# EAGLE board cpc_backplane_v1.10 (EAGLE 6.4)
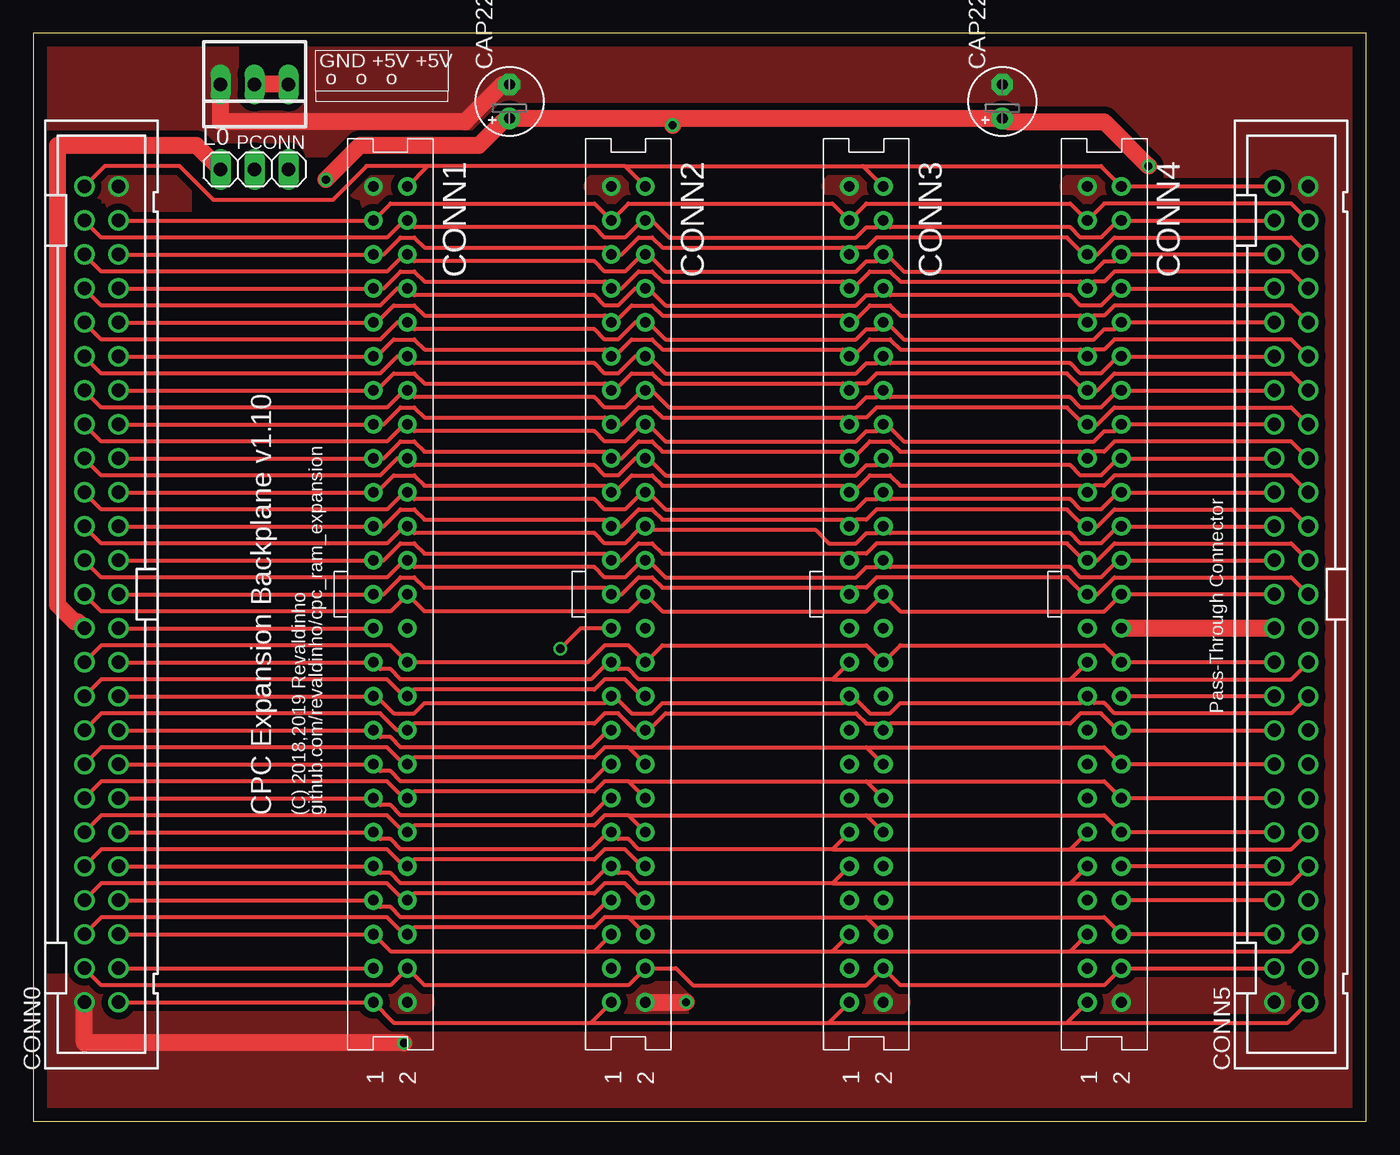
[diagram p0: board, top side]
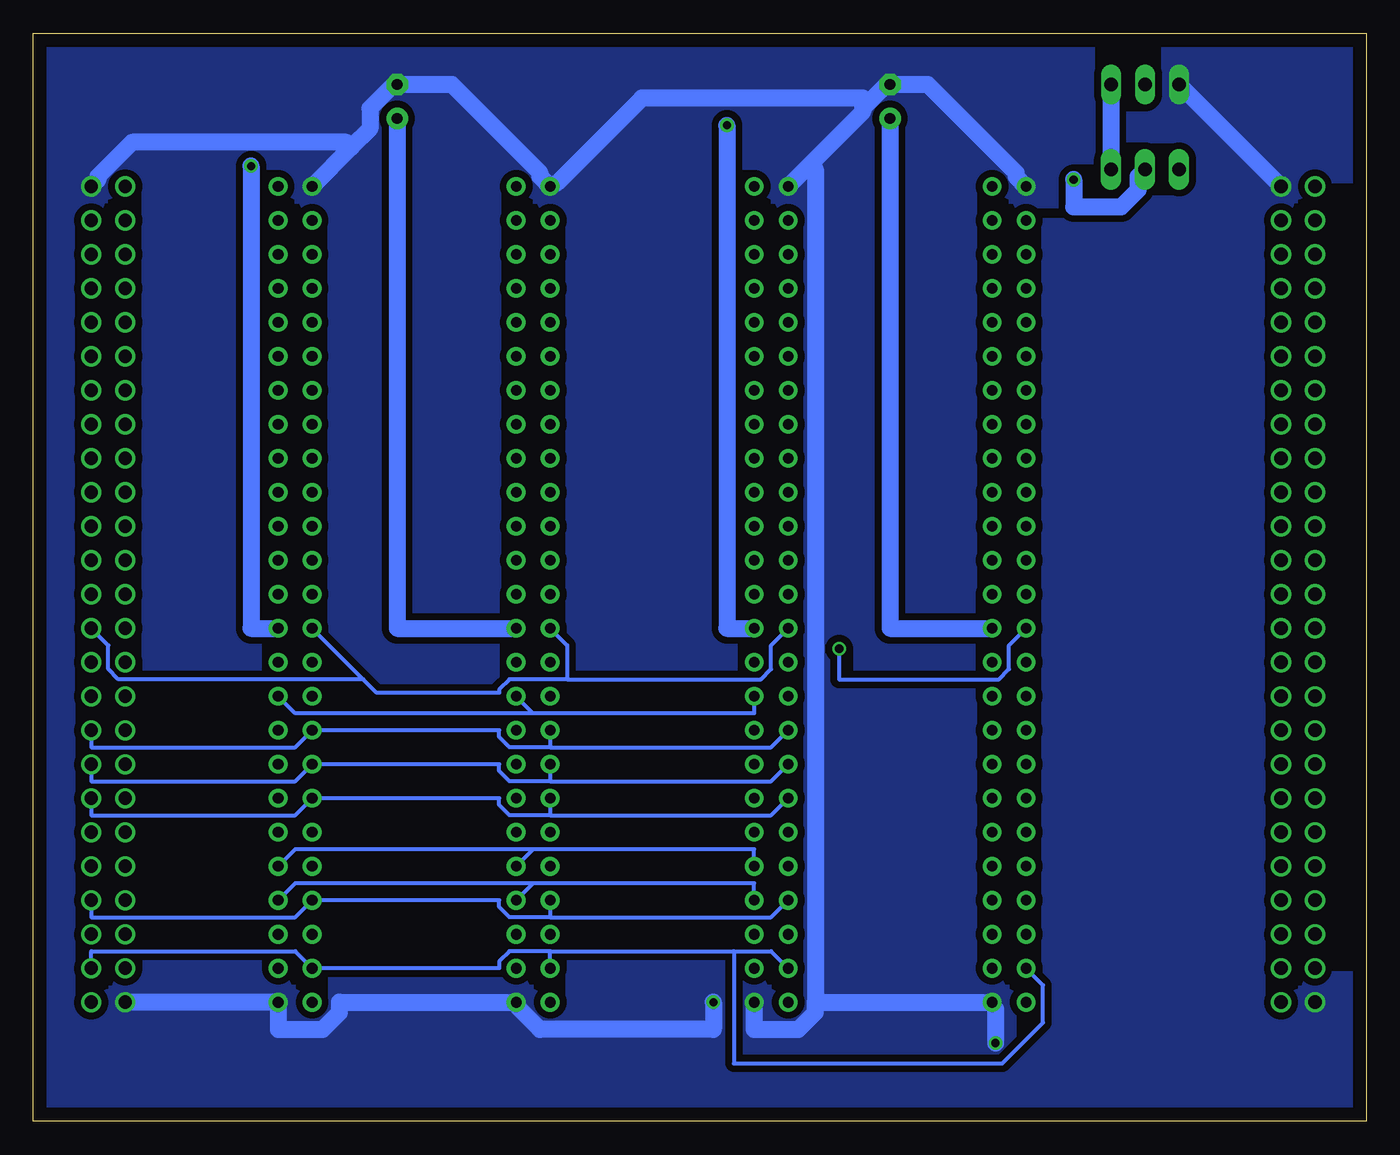
[diagram p1: board, bottom side, seen from below]

Size 99.57 x 81.28 mm. Coordinates in mm from the lower left corner, seen from the top.
Outline: 0,0 99.57,0 99.57,81.28 0,81.28 0,0
Copper layers (1*16): Top 0.035mm / dielectric 1.5mm / Bottom 0.035mm
Design rules "default": minimum track width 10mil, minimum drill 24mil, track to track 8mil, track to pad 8mil, pad to pad 8mil, via to via 8mil, smd to smd 8mil, copper to edge 40mil, drill to drill 8mil, minimum pad ring 10mil, minimum via ring 8mil, stop-mask expansion 4mil, vias tented up to drill 0mil, thermal gap 10mil
Net classes: 0 signal: width 0.305 mm, clearance 0.254 mm; 1 supply: width 1.27 mm, clearance 0.508 mm

## Footprints (pad centres in the part's own frame; a part is rotated, then mirrored left to right if it is on the bottom)
E2,5-5 = drill 0.813 pad 1.6: + -1.27,0 | drill 0.813 pad 1.6 octagon: - 1.27,0
PAK100/2500-50 = drill 1 pad 1.422: 1 -30.48,-1.27; 2 -30.48,1.27; 3 -27.94,-1.27; 4 -27.94,1.27; 5 -25.4,-1.27; 6 -25.4,1.27; 7 -22.86,-1.27; 8 -22.86,1.27; 9 -20.32,-1.27; 10 -20.32,1.27; 11 -17.78,-1.27; 12 -17.78,1.27; 13 -15.24,-1.27; 14 -15.24,1.27; 15 -12.7,-1.27; 16 -12.7,1.27; 17 -10.16,-1.27; 18 -10.16,1.27; 19 -7.62,-1.27; 20 -7.62,1.27; 21 -5.08,-1.27; 22 -5.08,1.27; 23 -2.54,-1.27; 24 -2.54,1.27; 25 0,-1.27; 26 0,1.27; 27 2.54,-1.27; 28 2.54,1.27; 29 5.08,-1.27; 30 5.08,1.27; 31 7.62,-1.27; 32 7.62,1.27; 33 10.16,-1.27; 34 10.16,1.27; 35 12.7,-1.27; 36 12.7,1.27; 37 15.24,-1.27; 38 15.24,1.27; 39 17.78,-1.27; 40 17.78,1.27; 41 20.32,-1.27; 42 20.32,1.27; 43 22.86,-1.27; 44 22.86,1.27; 45 25.4,-1.27; 46 25.4,1.27; 47 27.94,-1.27; 48 27.94,1.27; 49 30.48,-1.27; 50 30.48,1.27
S50V = drill 0.8 pad 1.4: 1 30.48,-1.27; 2 30.48,1.27; 3 27.94,-1.27; 4 27.94,1.27; 5 25.4,-1.27; 6 25.4,1.27; 7 22.86,-1.27; 8 22.86,1.27; 9 20.32,-1.27; 10 20.32,1.27; 11 17.78,-1.27; 12 17.78,1.27; 13 15.24,-1.27; 14 15.24,1.27; 15 12.7,-1.27; 16 12.7,1.27; 17 10.16,-1.27; 18 10.16,1.27; 19 7.62,-1.27; 20 7.62,1.27; 21 5.08,-1.27; 22 5.08,1.27; 23 2.54,-1.27; 24 2.54,1.27; 25 0,-1.27; 26 0,1.27; 27 -2.54,-1.27; 28 -2.54,1.27; 29 -5.08,-1.27; 30 -5.08,1.27; 31 -7.62,-1.27; 32 -7.62,1.27; 33 -10.16,-1.27; 34 -10.16,1.27; 35 -12.7,-1.27; 36 -12.7,1.27; 37 -15.24,-1.27; 38 -15.24,1.27; 39 -17.78,-1.27; 40 -17.78,1.27; 41 -20.32,-1.27; 42 -20.32,1.27; 43 -22.86,-1.27; 44 -22.86,1.27; 45 -25.4,-1.27; 46 -25.4,1.27; 47 -27.94,-1.27; 48 -27.94,1.27; 49 -30.48,-1.27; 50 -30.48,1.27
1X03 = drill 1.016 long: 1 -2.54,0; 2 0,0; 3 2.54,0
22-23-2031 = drill 1 long: 1 -2.54,0; 2 0,0; 3 2.54,0

## Placement (x,y rotation side)
CAP22UF_0  [E2,5-5]  35.56,76.2 90 top
CAP22UF_1  [E2,5-5]  72.39,76.2 90 top
CONN0  [PAK100/2500-50]  5.08,39.37 90 top
CONN1  [S50V]  26.67,39.37 270 top
CONN2  [S50V]  44.45,39.37 270 top
CONN3  [S50V]  62.23,39.37 270 top
CONN4  [S50V]  80.01,39.37 270 top
CONN5  [PAK100/2500-50]  93.98,39.37 90 top
L0  [1X03]  16.51,71.12 0 top
PCONN  [22-23-2031]  16.51,77.47 180 top

## Library data of the parts
CAP22UF_0 CAP22UF_1 = resistor
CONN0 CONN5 = con-3m
CONN1-CONN4 = con-3m-skt-header
L0 = pinhead
PCONN = con-molex

## Nets
A0: CONN0.33 CONN1.33 CONN2.33 CONN3.33 CONN4.33 CONN5.33
A1: CONN0.34 CONN1.34 CONN2.34 CONN3.34 CONN4.34 CONN5.34
A2: CONN0.35 CONN1.35 CONN2.35 CONN3.35 CONN4.35 CONN5.35
A3: CONN0.36 CONN1.36 CONN2.36 CONN3.36 CONN4.36 CONN5.36
A4: CONN0.37 CONN1.37 CONN2.37 CONN3.37 CONN4.37 CONN5.37
A5: CONN0.38 CONN1.38 CONN2.38 CONN3.38 CONN4.38 CONN5.38
A6: CONN0.39 CONN1.39 CONN2.39 CONN3.39 CONN4.39 CONN5.39
A7: CONN0.40 CONN1.40 CONN2.40 CONN3.40 CONN4.40 CONN5.40
A8: CONN0.41 CONN1.41 CONN2.41 CONN3.41 CONN4.41 CONN5.41
A9: CONN0.42 CONN1.42 CONN2.42 CONN3.42 CONN4.42 CONN5.42
A10: CONN0.43 CONN1.43 CONN2.43 CONN3.43 CONN4.43 CONN5.43
A11: CONN0.44 CONN1.44 CONN2.44 CONN3.44 CONN4.44 CONN5.44
A12: CONN0.45 CONN1.45 CONN2.45 CONN3.45 CONN4.45 CONN5.45
A13: CONN0.46 CONN1.46 CONN2.46 CONN3.46 CONN4.46 CONN5.46
A14: CONN0.47 CONN1.47 CONN2.47 CONN3.47 CONN4.47 CONN5.47
A15: CONN0.48 CONN1.48 CONN2.48 CONN3.48 CONN4.48 CONN5.48
BUSACK_B: CONN0.13 CONN1.13 CONN2.13 CONN3.13 CONN4.13 CONN5.13
BUSRESET_B: CONN0.11 CONN1.11 CONN2.11 CONN3.11 CONN4.11 CONN5.11
BUSRQ_B: CONN0.14 CONN1.14 CONN2.14 CONN3.14 CONN4.14 CONN5.14
CLK: CONN0.1 CONN1.1 CONN2.1 CONN3.1 CONN4.1 CONN5.1
CURSOR: CONN0.5 CONN1.5 CONN2.5 CONN3.5 CONN4.5 CONN5.5
D0: CONN0.25 CONN1.25 CONN2.25 CONN3.25 CONN4.25 CONN5.25
D1: CONN0.26 CONN1.26 CONN2.26 CONN3.26 CONN4.26 CONN5.26
D2: CONN0.27 CONN1.27 CONN2.27 CONN3.27 CONN4.27 CONN5.27
D3: CONN0.28 CONN1.28 CONN2.28 CONN3.28 CONN4.28 CONN5.28
D4: CONN0.29 CONN1.29 CONN2.29 CONN3.29 CONN4.29 CONN5.29
D5: CONN0.30 CONN1.30 CONN2.30 CONN3.30 CONN4.30 CONN5.30
D6: CONN0.31 CONN1.31 CONN2.31 CONN3.31 CONN4.31 CONN5.31
D7: CONN0.32 CONN1.32 CONN2.32 CONN3.32 CONN4.32 CONN5.32
EXP_B: CONN0.3 CONN1.3 CONN2.3 CONN3.3 CONN4.3 CONN5.3
HALT_B: CONN0.17 CONN1.17 CONN2.17 CONN3.17 CONN4.17 CONN5.17
INT_B: CONN0.16 CONN1.16 CONN2.16 CONN3.16 CONN4.16 CONN5.16
IOREQ_B: CONN0.20 CONN1.20 CONN2.20 CONN3.20 CONN4.20 CONN5.20
LPEN: CONN0.4 CONN1.4 CONN2.4 CONN3.4 CONN4.4 CONN5.4
M1_B: CONN0.22 CONN1.22 CONN2.22 CONN3.22 CONN4.22 CONN5.22
MREQ_B: CONN0.23 CONN1.23 CONN2.23 CONN3.23 CONN4.23 CONN5.23
NMI_B: CONN0.15 CONN1.15 CONN2.15 CONN3.15 CONN4.15 CONN5.15
RAMDIS: CONN0.6 CONN1.6 CONN2.6 CONN3.6 CONN4.6 CONN5.6
RAMRD_B: CONN0.7 CONN1.7 CONN2.7 CONN3.7 CONN4.7 CONN5.7
RD_B: CONN0.19 CONN1.19 CONN2.19 CONN3.19 CONN4.19 CONN5.19
READY: CONN0.12 CONN1.12 CONN2.12 CONN3.12 CONN4.12 CONN5.12
RESET_B: CONN0.10 CONN1.10 CONN2.10 CONN3.10 CONN4.10 CONN5.10
RFSH_B: CONN0.21 CONN1.21 CONN2.21 CONN3.21 CONN4.21 CONN5.21
ROMDIS: CONN0.8 CONN1.8 CONN2.8 CONN3.8 CONN4.8 CONN5.8
ROMEN_B: CONN0.9 CONN1.9 CONN2.9 CONN3.9 CONN4.9 CONN5.9
SOUND: CONN0.50 CONN1.50 CONN2.50 CONN3.50 CONN4.50 CONN5.50
VDD1 [supply]: CAP22UF_0.+ CAP22UF_1.+ CONN1.24 CONN2.24 CONN3.24 CONN4.24 CONN5.24 L0.2
VDD_CPC [supply]: CONN0.24 L0.1
VDD_EXT [supply]: L0.3 PCONN.1 PCONN.2
VSS [supply]: CAP22UF_0.- CAP22UF_1.- CONN0.2 CONN0.49 CONN1.2 CONN1.49 CONN2.2 CONN2.49 CONN3.2 CONN3.49 CONN4.2 CONN4.49 CONN5.2 CONN5.49 PCONN.3
WR_B: CONN0.18 CONN1.18 CONN2.18 CONN3.18 CONN4.18 CONN5.18

## Tracks (layer width: path | path; a pad name or v marks a point on that pad's centre or on a via)
A0
  Top 0.305: CONN5.33 93.98,50.8 80.77,50.8 80.01,50.04 79.25,50.04 CONN4.33 78.23,50.04 64.77,50.04 64.01,50.8 62.48,50.8 61.21,49.53 CONN3.33 60.45,50.04 46.99,50.04 46.23,50.8 45.21,50.8 43.94,49.53 CONN2.33 42.67,50.04 29.21,50.04 28.45,50.8 27.43,50.8 26.16,49.53 CONN1.33 CONN0.33
A1
  Top 0.305: CONN5.34 CONN4.34 81.03,49.53 79.76,48.26 78.23,48.26 77.47,49.02 64.01,49.02 CONN3.34 62.99,49.02 62.23,49.02 61.47,48.26 47.24,48.26 45.97,49.53 CONN2.34 44.96,49.53 43.69,48.26 42.67,48.26 41.91,49.02 28.45,49.02 CONN1.34 27.18,49.53 25.91,48.26 5.08,48.26 CONN0.34
A2
  Top 0.305: CONN5.35 93.98,53.34 80.77,53.34 79.5,52.07 CONN4.35 78.49,52.07 77.22,53.34 62.99,53.34 62.23,52.58 61.47,52.58 CONN3.35 60.45,52.58 46.99,52.58 46.23,53.34 45.21,53.34 43.94,52.07 CONN2.35 42.67,52.58 29.21,52.58 28.45,53.34 27.43,53.34 26.16,52.07 CONN1.35 CONN0.35
A3
  Top 0.305: CONN5.36 CONN4.36 80.77,51.56 80.01,51.56 79.25,50.8 65.02,50.8 63.75,52.07 CONN3.36 62.99,51.56 62.23,51.56 61.47,50.8 47.24,50.8 45.97,52.07 CONN2.36 45.47,52.07 44.2,50.8 42.67,50.8 41.91,51.56 28.45,51.56 CONN1.36 27.69,52.07 26.42,50.8 5.08,50.8 CONN0.36
A4
  Top 0.305: CONN5.37 93.98,55.88 80.77,55.88 79.5,54.61 CONN4.37 78.49,54.61 77.22,55.88 62.99,55.88 62.23,55.12 61.47,55.12 CONN3.37 60.45,55.12 46.99,55.12 46.23,55.88 44.7,55.88 43.43,54.61 CONN2.37 42.67,55.12 29.21,55.12 28.45,55.88 26.92,55.88 25.65,54.61 CONN1.37 CONN0.37
A5
  Top 0.305: CONN5.38 CONN4.38 81.03,54.61 79.76,53.34 78.23,53.34 77.47,54.1 64.01,54.1 CONN3.38 62.99,54.1 62.23,54.1 61.47,53.34 47.5,53.34 46.23,54.61 CONN2.38 45.47,54.61 44.2,53.34 42.67,53.34 41.91,54.1 28.45,54.1 CONN1.38 27.69,54.61 26.42,53.34 5.08,53.34 CONN0.38
A6
  Top 0.305: CONN5.39 93.98,58.42 80.77,58.42 80.01,57.66 79.25,57.66 CONN4.39 78.23,57.66 64.77,57.66 64.01,58.42 62.48,58.42 61.21,57.15 CONN3.39 60.45,57.66 46.99,57.66 46.23,58.42 44.7,58.42 43.43,57.15 CONN2.39 42.67,57.66 29.21,57.66 28.45,58.42 26.92,58.42 25.65,57.15 CONN1.39 CONN0.39
A7
  Top 0.305: CONN5.40 CONN4.40 81.03,57.15 79.76,55.88 78.23,55.88 77.47,56.64 64.01,56.64 CONN3.40 62.99,56.64 62.23,56.64 61.47,55.88 47.24,55.88 45.97,57.15 CONN2.40 44.96,57.15 43.69,55.88 42.67,55.88 41.91,56.64 28.45,56.64 CONN1.40 27.18,57.15 25.91,55.88 5.08,55.88 CONN0.40
A8
  Top 0.305: CONN5.41 93.98,60.96 80.77,60.96 80.01,60.2 79.25,60.2 CONN4.41 78.23,60.2 64.77,60.2 64.01,60.96 62.48,60.96 61.21,59.69 CONN3.41 60.45,60.2 46.99,60.2 46.23,60.96 44.7,60.96 43.43,59.69 CONN2.41 42.67,60.2 29.21,60.2 28.45,60.96 26.92,60.96 25.65,59.69 CONN1.41 CONN0.41
A9
  Top 0.305: CONN5.42 CONN4.42 80.77,59.18 80.01,59.18 79.25,58.42 65.02,58.42 63.75,59.69 CONN3.42 62.99,59.18 62.23,59.18 61.47,58.42 47.24,58.42 45.97,59.69 CONN2.42 44.96,59.69 43.69,58.42 42.67,58.42 41.91,59.18 28.45,59.18 CONN1.42 27.18,59.69 25.91,58.42 5.08,58.42 CONN0.42
A10
  Top 0.305: CONN5.43 93.98,63.5 80.77,63.5 80.01,62.74 79.25,62.74 CONN4.43 78.23,62.74 64.77,62.74 64.01,63.5 62.48,63.5 61.21,62.23 CONN3.43 60.45,62.74 46.99,62.74 46.23,63.5 45.21,63.5 43.94,62.23 CONN2.43 42.67,62.74 29.21,62.74 28.45,63.5 27.43,63.5 26.16,62.23 CONN1.43 CONN0.43
A11
  Top 0.305: CONN5.44 CONN4.44 81.03,62.23 79.76,60.96 78.23,60.96 77.47,61.72 64.01,61.72 CONN3.44 62.99,61.72 62.23,61.72 61.47,60.96 47.24,60.96 45.97,62.23 CONN2.44 44.96,62.23 43.69,60.96 42.67,60.96 41.91,61.72 28.45,61.72 CONN1.44 27.18,62.23 25.91,60.96 5.08,60.96 CONN0.44
A12
  Top 0.305: CONN5.45 93.98,66.04 80.77,66.04 79.5,64.77 CONN4.45 78.49,64.77 77.22,66.04 62.99,66.04 62.23,65.28 61.47,65.28 CONN3.45 60.45,65.28 46.99,65.28 46.23,66.04 45.21,66.04 43.94,64.77 CONN2.45 42.67,65.28 29.21,65.28 28.45,66.04 27.43,66.04 26.16,64.77 CONN1.45 CONN0.45
A13
  Top 0.305: CONN5.46 CONN4.46 80.77,64.26 80.01,64.26 79.25,63.5 65.02,63.5 63.75,64.77 CONN3.46 62.99,64.26 62.23,64.26 61.47,63.5 47.24,63.5 45.97,64.77 CONN2.46 45.47,64.77 44.2,63.5 42.67,63.5 41.91,64.26 28.45,64.26 CONN1.46 27.69,64.77 26.42,63.5 5.08,63.5 CONN0.46
A14
  Top 0.305: CONN5.47 93.98,68.58 80.01,68.58 CONN4.47 77.47,68.58 62.23,68.58 CONN3.47 59.69,68.58 44.45,68.58 CONN2.47 41.91,68.58 26.67,68.58 CONN1.47 CONN0.47
A15
  Top 0.305: CONN5.48 CONN4.48 81.03,67.31 79.76,66.04 78.23,66.04 77.47,66.8 64.01,66.8 CONN3.48 62.99,66.8 62.23,66.8 61.47,66.04 47.5,66.04 46.23,67.31 CONN2.48 45.47,67.31 44.2,66.04 42.67,66.04 41.91,66.8 28.45,66.8 CONN1.48 27.69,67.31 26.42,66.04 5.08,66.04 CONN0.48
BUSACK_B
  Top 0.305: CONN0.13 CONN1.13 25.91,23.62 26.67,23.62 27.43,22.86 41.66,22.86 42.93,24.13 CONN2.13
  Bottom 0.305: CONN5.13 95.25,22.86 80.01,22.86 CONN4.13 64.77,24.13 64.77,23.62 64.01,22.86 60.96,22.86 | CONN2.13 44.45,22.86 60.96,22.86 | CONN3.13 60.96,22.86
BUSRESET_B
  Top 0.305: CONN0.11 CONN1.11 25.91,21.08 26.67,21.08 27.43,20.32 41.66,20.32 42.93,21.59 CONN2.11 43.69,21.08 44.45,21.08 45.21,20.32 59.69,20.32 | CONN3.11 59.69,20.32 | 77.47,20.32 CONN4.11 | 59.69,20.32 77.47,20.32 | CONN5.11 93.98,20.32 77.47,20.32
BUSRQ_B
  Top 0.305: CONN5.14 CONN4.14 80.01,25.4 62.23,25.4 | 44.45,25.4 42.67,25.4 41.91,24.64 28.45,24.64 CONN1.14 27.69,24.13 26.42,25.4 5.08,25.4 CONN0.14 | CONN2.14 44.45,25.4 | 62.23,25.4 CONN3.14 | 44.45,25.4 62.23,25.4
CLK
  Top 0.305: CONN0.1 CONN1.1 26.92,7.37 41.66,7.37 | 41.66,7.37 CONN2.1 | 59.44,7.37 CONN3.1 | 41.66,7.37 59.44,7.37 | 77.22,7.37 CONN4.1 | 59.44,7.37 77.22,7.37 | CONN5.1 93.73,7.37 77.22,7.37
CURSOR
  Top 0.305: CONN0.5 CONN1.5 26.67,12.7 41.91,12.7 | 41.91,12.7 CONN2.5 | 59.69,12.7 CONN3.5 | 41.91,12.7 59.69,12.7 | 77.47,12.7 CONN4.5 | 59.69,12.7 77.47,12.7 | CONN5.5 93.98,12.7 77.47,12.7
D0
  Top 0.305: CONN5.25 93.98,40.64 80.77,40.64 79.5,39.37 CONN4.25 78.49,39.37 77.22,40.64 62.99,40.64 62.23,39.88 61.47,39.88 CONN3.25 60.45,39.88 46.99,39.88 46.23,40.64 45.21,40.64 43.94,39.37 CONN2.25 42.67,39.88 29.21,39.88 28.45,40.64 27.43,40.64 26.16,39.37 CONN1.25 CONN0.25
D1
  Top 0.305: CONN5.26 CONN4.26 80.01,38.1 64.77,38.1 CONN3.26 62.23,38.1 46.99,38.1 CONN2.26 44.45,38.1 29.21,38.1 CONN1.26 26.67,38.1 5.08,38.1 CONN0.26
D2
  Top 0.305: CONN5.27 93.98,43.18 80.77,43.18 79.5,41.91 CONN4.27 78.49,41.91 77.22,43.18 62.99,43.18 62.23,42.42 61.47,42.42 CONN3.27 60.45,42.42 46.99,42.42 46.23,43.18 45.21,43.18 43.94,41.91 CONN2.27 42.67,42.42 29.21,42.42 28.45,43.18 27.43,43.18 26.16,41.91 CONN1.27 CONN0.27
D3
  Top 0.305: CONN5.28 CONN4.28 81.03,41.91 79.76,40.64 78.23,40.64 77.47,41.4 64.01,41.4 CONN3.28 62.99,41.4 62.23,41.4 61.47,40.64 47.24,40.64 45.97,41.91 CONN2.28 45.47,41.91 44.2,40.64 42.67,40.64 41.91,41.4 28.45,41.4 CONN1.28 27.69,41.91 26.42,40.64 5.08,40.64 CONN0.28
D4
  Top 0.305: CONN5.29 93.98,45.72 80.77,45.72 79.5,44.45 CONN4.29 78.49,44.45 77.22,45.72 62.99,45.72 62.23,44.96 61.47,44.96 CONN3.29 60.45,44.96 46.99,44.96 46.23,45.72 45.21,45.72 43.94,44.45 CONN2.29 42.67,44.96 29.21,44.96 28.45,45.72 27.43,45.72 26.16,44.45 CONN1.29 CONN0.29
D5
  Top 0.305: CONN5.30 CONN4.30 81.03,44.45 79.76,43.18 78.23,43.18 77.47,43.94 64.01,43.94 CONN3.30 62.99,43.94 62.23,43.94 61.47,43.18 59.44,43.18 58.42,44.2 45.21,44.2 | 45.21,44.2 45.47,44.45 CONN2.30 45.21,44.2 | 45.21,44.2 44.2,43.18 42.67,43.18 41.91,43.94 28.45,43.94 CONN1.30 27.69,44.45 26.42,43.18 5.08,43.18 CONN0.30
D6
  Top 0.305: CONN5.31 93.98,48.26 80.77,48.26 80.01,47.5 79.25,47.5 CONN4.31 78.23,47.5 64.77,47.5 64.01,48.26 62.48,48.26 61.21,46.99 CONN3.31 60.45,47.5 46.99,47.5 46.23,48.26 44.7,48.26 43.43,46.99 CONN2.31 42.67,47.5 29.21,47.5 28.45,48.26 26.92,48.26 25.65,46.99 CONN1.31 CONN0.31
D7
  Top 0.305: CONN5.32 CONN4.32 81.03,46.99 79.76,45.72 78.23,45.72 77.47,46.48 64.01,46.48 CONN3.32 62.99,46.48 62.23,46.48 61.47,45.72 47.24,45.72 45.97,46.99 CONN2.32 45.47,46.99 44.2,45.72 42.67,45.72 41.91,46.48 28.45,46.48 CONN1.32 27.69,46.99 26.42,45.72 5.08,45.72 CONN0.32
EXP_B
  Top 0.305: CONN0.3 CONN1.3
  Bottom 0.305: CONN5.3 95.25,12.7 80.01,12.7 CONN4.3 64.77,11.43 64.77,11.94 64.01,12.7 60.96,12.7 | CONN2.3 44.45,12.7 47.24,12.7 | 60.96,12.7 47.24,12.7 | CONN3.3 60.96,12.7 | CONN1.3 24.13,10.16 24.13,7.37 27.18,4.32 47.24,4.32 47.24,12.7
HALT_B
  Top 0.305: CONN0.17 CONN1.17 25.91,28.7 26.67,28.7 27.43,27.94 41.66,27.94 42.93,29.21 CONN2.17
  Bottom 0.305: CONN5.17 95.25,27.94 80.01,27.94 CONN4.17 64.77,29.21 64.77,28.7 64.01,27.94 60.96,27.94 | CONN2.17 44.45,27.94 60.96,27.94 | CONN3.17 60.96,27.94
INT_B
  Top 0.305: CONN5.16 CONN4.16 80.01,27.94 62.23,27.94 | 44.45,27.94 42.67,27.94 41.91,27.18 28.45,27.18 CONN1.16 27.69,26.67 26.42,27.94 5.08,27.94 CONN0.16 | CONN2.16 44.45,27.94 | 62.23,27.94 CONN3.16 | 44.45,27.94 62.23,27.94
IOREQ_B
  Top 0.305: CONN5.20 CONN4.20 | CONN2.20 45.47,31.75 44.2,33.02 42.67,33.02 41.91,32.26 28.45,32.26 CONN1.20 27.69,31.75 26.42,33.02 5.08,33.02 CONN0.20
  Bottom 0.305: 62.23,30.48 CONN3.20 | 62.23,30.48 45.72,30.48 CONN2.20 | CONN4.20 80.01,30.48 62.23,30.48
LPEN
  Top 0.305: CONN5.4 CONN4.4 80.01,10.16 64.77,10.16 CONN3.4 62.23,10.16 49.28,10.16 48.01,11.43 CONN2.4 44.45,10.16 29.21,10.16 CONN1.4 26.67,10.16 5.08,10.16 CONN0.4
M1_B
  Top 0.305: CONN5.22 CONN4.22 80.01,35.56 64.77,35.56 CONN3.22 62.23,35.56 46.99,35.56 CONN2.22 44.45,35.56 42.67,35.56 41.4,34.29 CONN1.22 26.67,35.56 5.08,35.56 CONN0.22
MREQ_B  (via drill 0.61)
  Top 0.305: CONN0.23 CONN1.23 | v39.37,35.31 40.89,36.83 CONN2.23
  Bottom 0.305: CONN2.23 44.45,35.56 44.45,33.78 45.21,33.02 59.69,33.02 | 59.69,33.02 59.69,35.56 CONN3.23 | 74.93,33.02 73.91,32 64.77,32 64.77,32.26 64.01,33.02 59.69,33.02 | 74.93,33.02 CONN4.23 | CONN5.23 93.98,35.56 93.98,33.78 93.22,33.02 74.93,33.02 | CONN1.23 26.67,35.56 26.67,33.78 27.43,33.02 39.37,33.02 v39.37,35.31
NMI_B
  Top 0.305: CONN0.15 CONN1.15 25.91,26.16 26.67,26.16 27.43,25.4 41.66,25.4 42.93,26.67 CONN2.15
  Bottom 0.305: CONN5.15 95.25,25.4 80.01,25.4 CONN4.15 64.77,26.67 64.77,26.16 64.01,25.4 60.96,25.4 | CONN2.15 44.45,25.4 60.96,25.4 | CONN3.15 60.96,25.4
RAMDIS
  Top 0.305: CONN5.6 CONN4.6 80.01,15.24 62.23,15.24 | 44.45,15.24 42.67,15.24 41.91,14.48 28.45,14.48 CONN1.6 27.69,13.97 26.42,15.24 5.08,15.24 CONN0.6 | CONN2.6 44.45,15.24 | 62.23,15.24 CONN3.6 | 44.45,15.24 62.23,15.24
RAMRD_B
  Top 0.305: CONN0.7 CONN1.7 25.91,16 26.67,16 27.43,15.24 41.66,15.24 42.93,16.51 CONN2.7
  Bottom 0.305: CONN5.7 95.25,15.24 80.01,15.24 CONN4.7 64.77,16.51 64.77,16 64.01,15.24 60.96,15.24 | CONN2.7 44.45,15.24 60.96,15.24 | CONN3.7 60.96,15.24
RD_B
  Top 0.305: CONN5.19 93.98,30.48 80.77,30.48 80.01,31.24 79.25,31.24 CONN4.19 78.23,31.24 64.77,31.24 64.01,30.48 62.48,30.48 61.21,31.75 CONN3.19 60.45,31.24 46.99,31.24 46.23,30.48 44.7,30.48 43.43,31.75 CONN2.19 42.67,31.24 29.21,31.24 28.45,30.48 26.92,30.48 25.65,31.75 CONN1.19 CONN0.19
READY
  Top 0.305: CONN5.12 CONN4.12 80.01,22.86 62.23,22.86 | 44.45,22.86 42.67,22.86 41.91,22.1 28.45,22.1 CONN1.12 27.69,21.59 26.42,22.86 5.08,22.86 CONN0.12 | CONN2.12 44.45,22.86 | 62.23,22.86 CONN3.12 | 44.45,22.86 62.23,22.86
RESET_B
  Top 0.305: CONN5.10 CONN4.10 | CONN2.10 45.47,19.05 44.2,20.32 42.67,20.32 41.91,19.56 28.45,19.56 CONN1.10 27.69,19.05 26.42,20.32 5.08,20.32 CONN0.10
  Bottom 0.305: 62.23,20.32 CONN3.10 | 62.23,20.32 45.72,20.32 CONN2.10 | CONN4.10 80.01,20.32 62.23,20.32
RFSH_B
  Top 0.305: CONN0.21 CONN1.21 25.91,33.78 26.67,33.78 27.43,33.02 41.66,33.02 42.93,34.29 CONN2.21 43.69,33.78 44.45,33.78 45.21,33.02 59.69,33.02 | CONN3.21 59.69,33.02 | 77.47,33.02 CONN4.21 | 59.69,33.02 77.47,33.02 | CONN5.21 93.98,33.02 77.47,33.02
ROMDIS
  Top 0.305: CONN5.8 CONN4.8 | CONN2.8 45.47,16.51 44.2,17.78 42.67,17.78 41.91,17.02 28.45,17.02 CONN1.8 27.69,16.51 26.42,17.78 5.08,17.78 CONN0.8
  Bottom 0.305: 62.23,17.78 CONN3.8 | 62.23,17.78 45.72,17.78 CONN2.8 | CONN4.8 80.01,17.78 62.23,17.78
ROMEN_B
  Top 0.305: CONN0.9 CONN1.9 25.91,18.54 26.67,18.54 27.43,17.78 41.66,17.78 42.93,19.05 CONN2.9 43.69,18.54 44.45,18.54 45.21,17.78 59.69,17.78 | CONN3.9 59.69,17.78 | 77.47,17.78 CONN4.9 | 59.69,17.78 77.47,17.78 | CONN5.9 93.98,17.78 77.47,17.78
SOUND
  Top 0.305: CONN5.50 CONN4.50 79.76,71.37 61.98,71.37 | 29.46,71.37 CONN1.50 | 44.2,71.37 29.46,71.37 | CONN2.50 44.2,71.37 | 61.98,71.37 CONN3.50 | 44.2,71.37 61.98,71.37 | CONN0.50 5.33,71.37 10.92,71.37 13.46,68.83 22.35,68.83 24.89,71.37 29.46,71.37
VDD1  (via drill 0.61)
  Top 1.27: 47.75,74.93 CAP22UF_0.+ 35.05,74.68 33.27,72.9 24.38,72.9 v21.84,70.36 | 47.75,74.93 CAP22UF_1.+ 72.9,74.68 80.01,74.68 v83.31,71.37 | CONN5.24 CONN4.24 | v47.75,74.42 47.75,74.93
  Bottom 1.27: CONN1.24 35.56,36.83 CAP22UF_0.+ | CONN2.24 47.75,36.83 v47.75,74.42 | CONN3.24 72.39,36.83 CAP22UF_1.+ | L0.2 17.02,70.61 17.02,69.6 18.29,68.33 21.84,68.33 v21.84,70.36 | CONN4.24 83.31,36.83 v83.31,71.37
VDD_CPC
  Top 1.27: CONN0.24 3.3,37.34 3.05,37.34 1.78,38.61 1.78,72.9 12.19,72.9 L0.1
VDD_EXT
  Top 1.27: PCONN.1 PCONN.2
  Bottom 1.27: PCONN.1 L0.3
VSS  (via drill 0.61)
  Top 1.27: CONN0.2 3.81,5.84 v27.69,5.84 | CONN2.2 v48.77,8.89 | PCONN.3 13.97,74.68 32.26,74.68 35.05,77.47 CAP22UF_0.-
  Bottom 1.27: CONN5.2 CONN4.2 81.28,6.86 77.98,6.86 76.71,8.13 76.71,8.89 CONN3.2 63.25,8.38 61.72,6.86 48.77,6.86 v48.77,8.89 | 41.15,8.89 CONN1.2 27.69,8.38 v27.69,5.84 | 41.15,8.89 41.15,8.13 42.42,6.86 45.72,6.86 CONN2.2 | 75.82,72.77 74.42,74.17 74.42,75.69 72.9,77.22 CAP22UF_1.- 68.33,77.47 61.72,70.87 61.72,70.61 CONN3.49 60.45,70.1 54.1,76.45 37.59,76.45 37.21,76.07 | 75.82,72.77 CONN4.49 | CONN5.49 94.74,70.36 94.74,70.61 92.2,73.15 76.2,73.15 75.82,72.77 | PCONN.3 CONN0.49 | CONN1.49 26.16,70.61 26.16,70.87 32.77,77.47 CAP22UF_0.- 36.07,77.22 37.21,76.07 | 41.53,71.5 37.59,75.44 37.59,75.69 37.21,76.07 | 41.53,71.5 CONN2.49 | 41.15,8.89 41.15,71.12 41.53,71.5
  pour Top: 0,0 0,81.28 99.57,81.28 100.33,81.28 100.33,0
  pour Bottom: 0,0 0,81.28 99.57,81.28 100.33,81.28 100.33,0
WR_B
  Top 0.305: CONN5.18 CONN4.18 81.03,29.21 79.76,30.48 78.23,30.48 77.47,29.72 64.01,29.72 CONN3.18 62.99,29.72 62.23,29.72 61.47,30.48 47.24,30.48 45.97,29.21 CONN2.18 44.96,29.21 43.69,30.48 42.67,30.48 41.91,29.72 28.45,29.72 CONN1.18 27.18,29.21 25.91,30.48 5.08,30.48 CONN0.18

## Text on the board
tPlace: GND +5V +5V | o o o | Pass-Through Connector | CPC Expansion Backplane v1.10 | (C) 2018,2019 Revaldinho | github.com/revaldinho/cpc_ram_expansion